# EAGLE board Brilliant Bojo-Fyyran (EAGLE 7.6.0)

Size 73.58 x 76.09 mm. Coordinates in mm from the lower left corner, seen from the top.
Outline: 0,0 56.82,0 56.82,53.33 0,53.33 0,0
Copper layers (1*16): Top 0.035mm / dielectric 1.5mm / Bottom 0.035mm
Design rules "default": minimum track width 10mil, minimum drill 24mil, track to track 8mil, track to pad 8mil, pad to pad 8mil, via to via 8mil, smd to smd 8mil, copper to edge 40mil, drill to drill 8mil, minimum pad ring 10mil, minimum via ring 8mil, stop-mask expansion 4mil, vias tented up to drill 0mil, thermal gap 10mil

## Footprints (pad centres in the part's own frame; a part is rotated, then mirrored left to right if it is on the bottom)
DC-POWER = drill 0.889 pad 2.54 octagon: + 0,2.54; - 0,-2.54
RADIAL-D11.36MM = drill 1.27 pad 1.905 square: + -2.54,0 | drill 1.27 pad 1.905: - 2.54,0
LED5MM = drill 0.813 octagon: A -1.27,0; K 1.27,0
D-7.5 = drill 0.813 long: A 3.81,0; C -3.81,0
2P-2.54-65/35MIL = drill 0.889 pad 1.651 square: 1 0,1.27 | drill 0.889 pad 1.651: 2 0,-1.27
0207/10 = drill 0.813 octagon: 1 -5.08,0; 2 5.08,0
TO92 = drill 0.813 octagon: 1 1.27,0; 2 0,1.905; 3 -1.27,0
1X16P-2.54-2.54-11.6-3.0-BLACK-MALE = drill 0.889 pad 1.651 square: 1 0,19.05 | drill 0.889 pad 1.651: 2 0,16.51; 3 0,13.97; 4 0,11.43; 5 0,8.89; 6 0,6.35; 7 0,3.81; 8 0,1.27; 9 0,-1.27; 10 0,-3.81; 11 0,-6.35; 12 0,-8.89; 13 0,-11.43; 14 0,-13.97; 15 0,-16.51; 16 0,-19.05
ARDUINO_UNO = drill 1.016 pad 1.88: 0 63.5,50.8; 1 60.96,50.8; 2 58.42,50.8; 3 55.88,50.8; 3.3V 35.56,2.54; 4 53.34,50.8; 5 50.8,50.8; 5V 38.1,2.54; 6 48.26,50.8; 7 45.72,50.8; 8 41.656,50.8; 9 39.116,50.8; 10 36.576,50.8; 11 34.036,50.8; 12 31.496,50.8; 13 28.956,50.8; A0 50.8,2.54; A1 53.34,2.54; A2 55.88,2.54; A3 58.42,2.54; A4 60.96,2.54; A5 63.5,2.54; AREF 23.876,50.8; GND 26.416,50.8; GND. 43.18,2.54; GND.. 40.64,2.54; I/OREF 30.48,2.54; N/C 27.94,2.54; RESET 33.02,2.54; SCL 18.796,50.8; SDA 21.336,50.8; VIN 45.72,2.54 | hole 3.2: 66.04,7.62; 66.04,35.56; 15.24,50.8; 13.97,2.54

## Placement (x,y rotation side)
BAT1  [DC-POWER]  5,60.88 0 top
C1  10uF  [RADIAL-D11.36MM]  5,111.68 0 top  (outside the outline)
D2  [LED5MM]  5,35.48 0 top
D5  [D-7.5]  5,124.38 0 top  (outside the outline)
M1  [2P-2.54-65/35MIL]  5,73.58 0 top
R6  1k‎Ω  [0207/10]  5,48.18 0 top
R7  1k‎Ω  [0207/10]  5,98.98 0 top  (outside the outline)
T1  [TO92]  5,137.08 0 top  (outside the outline)
U8  [1X16P-2.54-2.54-11.6-3.0-BLACK-MALE]  5,10.08 0 top
U10  [ARDUINO_UNO]  5,22.78 0 top
U12  [TO92]  5,86.28 0 top  (outside the outline)

## Library data of the parts
BAT1 C1 D2 D5 M1 R6 R7 T1 U8 U10 U12 = AUTODESK_CIRCUITS_BREADBOARD

## Nets
N$1: D2.K R6.2
N$2: D2.A U8.1 U8.3 U8.5 U8.16 U10.GND.. U12.1
N$3: BAT1.+ D5.C M1.2 U10.VIN
N$4: U8.2 U8.15 U10.5V U12.3
N$5: R6.1 U10.8
N$6: U10.A0 U12.2
N$7: U8.4 U10.2
N$8: U8.6 U10.3
N$9: U8.11 U10.4
N$10: U8.12 U10.5
N$11: U8.13 U10.6
N$12: U8.14 U10.7
N$13: R7.2 U10.11
N$14: C1.+ R7.1 T1.2
N$15: BAT1.- C1.- T1.3 U10.GND.
N$16: D5.A M1.1 T1.1

## Tracks (layer width: path | path; a pad name or v marks a point on that pad's centre or on a via)
N$1  (1 unrouted)
N$2  (6 unrouted)
N$3  (3 unrouted)
N$4  (3 unrouted)
N$5  (1 unrouted)
N$6  (1 unrouted)
N$7  (1 unrouted)
N$8  (1 unrouted)
N$9  (1 unrouted)
N$10  (1 unrouted)
N$11  (1 unrouted)
N$12  (1 unrouted)
N$13  (1 unrouted)
N$14  (2 unrouted)
N$15  (3 unrouted)
N$16  (2 unrouted)